# Altium PCB F_ROM.PcbDoc (part 1 of 3)
Units mil, origin at the board's own origin, x right, y up, seen from the top; angles counter-clockwise.
Board outline 10300 x 6600 mil, 2 copper layers (Top Layer, Bottom Layer); 788 components, 376 nets, 1392 pads, 0 vias.
Unrouted connection lines stored in the file: 465.
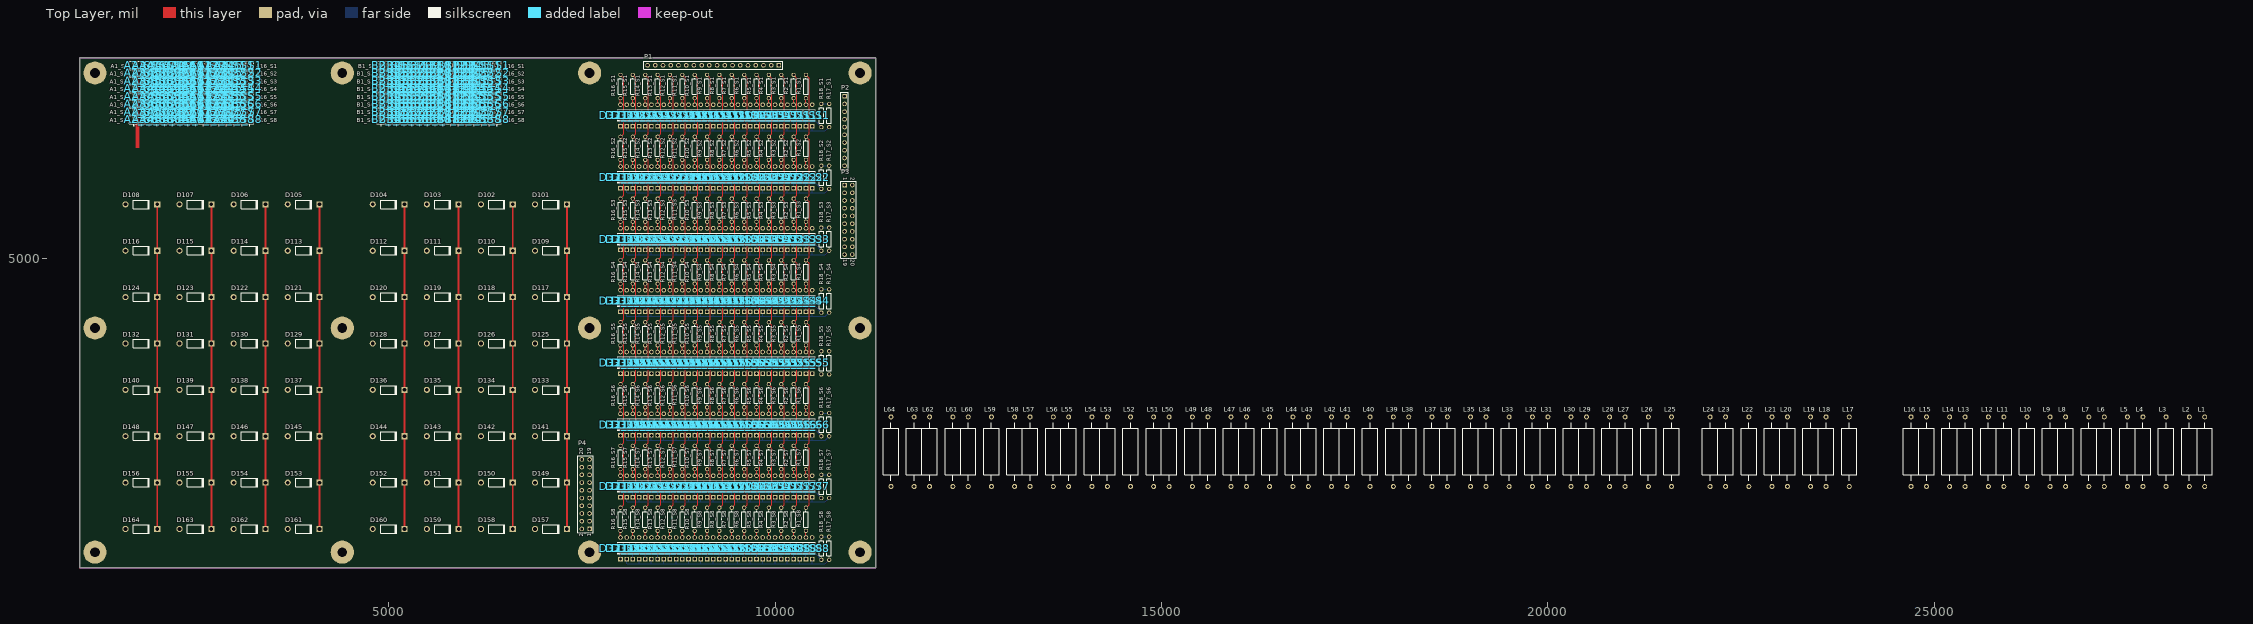
[diagram p0: Top Layer view]
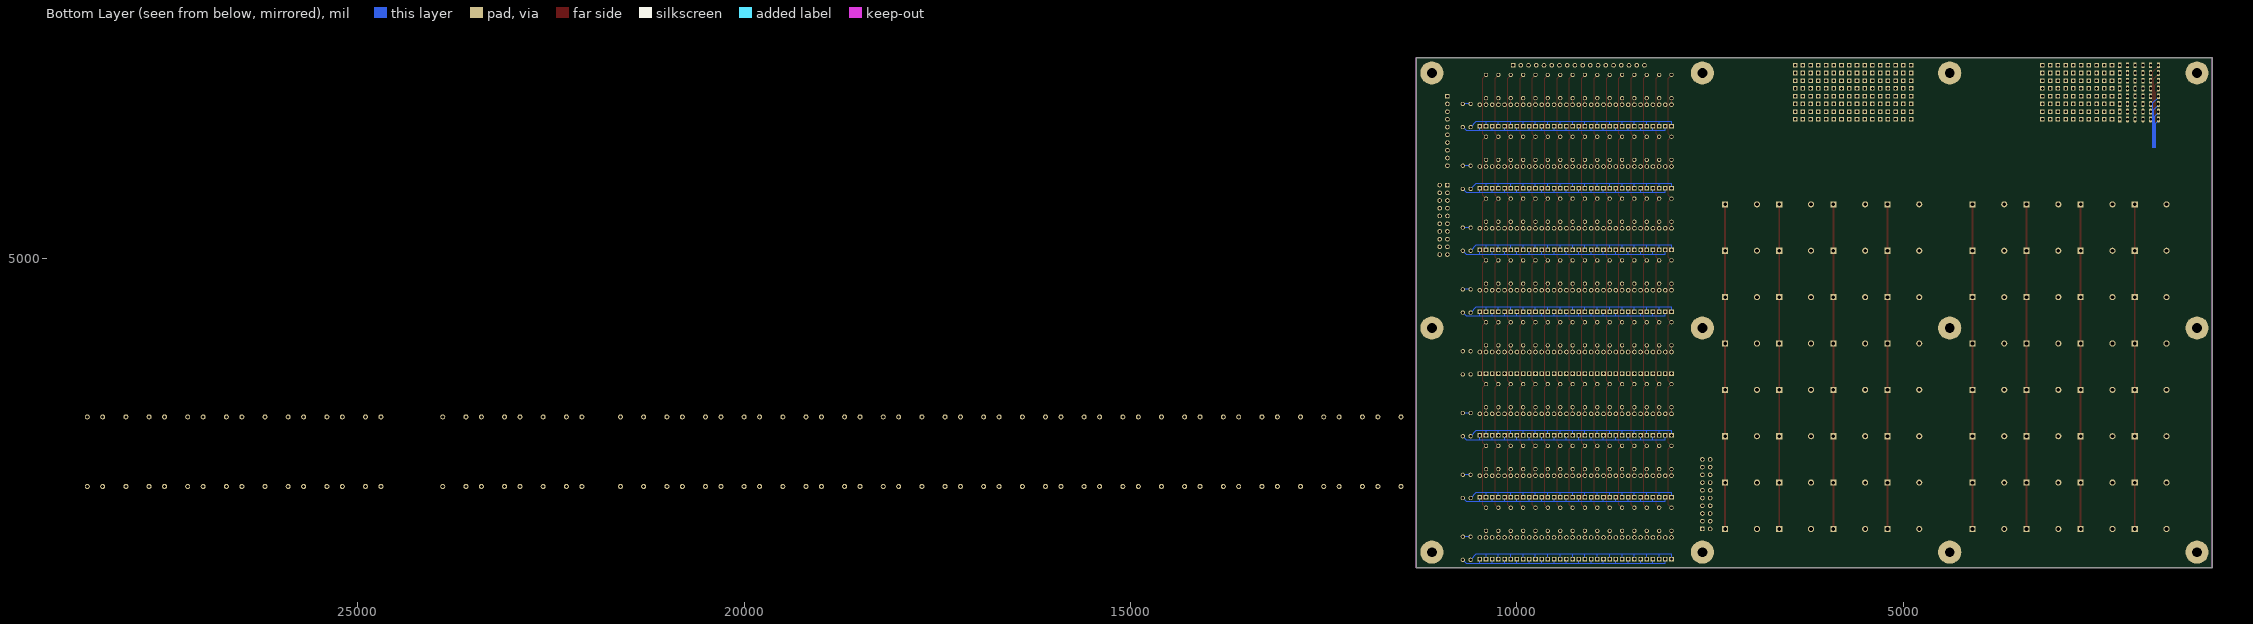
[diagram p1: Bottom Layer view, seen from below]

## Layer stack, top to bottom
Top Solder: solder mask 0.4, Solder Resist, Dk 3.5
Top Layer: signal copper 1.4
Dielectric 1: dielectric 12.6, FR-4, Dk 4.8
Bottom Layer: signal copper 1.4
Bottom Solder: solder mask 0.4, Solder Resist, Dk 3.5

## Board outline
1000,1000 1000,7600 11300,7600 11300,1000

## Design rules (kind name [scope] priority, off if disabled: settings)
Clearance [All] p1: gap=7 ignorepadtopadclearanceinfootprint=FALSE
PolygonConnect [All] p1: connectstyle=Relief reliefconductorwidth=10 reliefentries=4 polygonreliefangle="90 Angle" airgapwidth=10
RoomDefinition S1 [InComponentClass('S1')] p1: confinementstyle=ConfineIn formatcopy=TRUE lockcomponents=FALSE outline 7800,7450 7800,6650 10800,6650 10800,7450
RoomDefinition S7 [InComponentClass('S7')] p2: confinementstyle=ConfineIn formatcopy=TRUE lockcomponents=FALSE outline 7800,2650 7800,1850 10800,1850 10800,2650
RoomDefinition S2 [InComponentClass('S2')] p3: confinementstyle=ConfineIn formatcopy=TRUE lockcomponents=FALSE outline 7800,6650 7800,5850 10800,5850 10800,6650
RoomDefinition S3 [InComponentClass('S3')] p4: confinementstyle=ConfineIn formatcopy=TRUE lockcomponents=FALSE outline 7800,5850 7800,5050 10800,5050 10800,5850
RoomDefinition S4 [InComponentClass('S4')] p5: confinementstyle=ConfineIn formatcopy=TRUE lockcomponents=FALSE outline 7800,5050 7800,4250 10800,4250 10800,5050
RoomDefinition S5 [InComponentClass('S5')] p6: confinementstyle=ConfineIn formatcopy=TRUE lockcomponents=FALSE outline 7800,4250 7800,3450 10800,3450 10800,4250
RoomDefinition S6 [InComponentClass('S6')] p7: confinementstyle=ConfineIn formatcopy=TRUE lockcomponents=FALSE outline 7800,3450 7800,2650 10800,2650 10800,3450
RoomDefinition S8 [InComponentClass('S8')] p8: confinementstyle=ConfineIn formatcopy=TRUE lockcomponents=FALSE outline 7800,1850 7800,1050 10800,1050 10800,1850
RoutingVias [All] p1: holewidth=28 width=50 viastyle="Through Hole" minholewidth=28 minwidth=50 maxholewidth=28 maxwidth=50
SolderMaskExpansion [All] p1: expansion=4 istentingtop=FALSE
Width [All] p1: maxlimit=100 minlimit=6 preferedwidth=8
30 further rules are at their usual default settings.

## Classes and differential pairs
net class P[1..8]: P1 P2 P3 P4 P5 P6 P7 P8
net class N[1..8]: N1 N2 N3 N4 N5 N6 N7 N8
net class L[1..8]: L1 L2 L3 L4 L5 L6 L7 L8
net class H[1..8]: H1 H2 H3 H4 H5 H6 H7 H8
component class Array: D101 D102 D103 D104 D105 D106 D107 D108 D109 D110 D111 D112 D113 D114 D115 D116 D117 D118 D119 D120 D121 D122 D123 D124 D125 D126 D127 D128 D129 D130 D131 D132 D133 D134 D135 D136 D137 D138 D139 D140 D141 D142 D143 D144 D145 D146 D147 D148 D149 D150 D151 D152 D153 D154 D155 D156 D157 D158 D159 D160 D161 D162 D163 D164 L1 L2 L3 L4 L5 L6 L7 L8 L9 L10 L11 L12 L13 L14 L15 L16 L17 L18 L19 L20 L21 L22 L23 L24 L25 L26 L27 L28 L29 L30 L31 L32 L33 L34 L35 L36 L37 L38 L39 L40 L41 L42 L43 L44 L45 L46 L47 L48 L49 L50 L51 L52 L53 L54 L55 L56 L57 L58 L59 L60 L61 L62 L63 L64 P1 P2 P4
net class Y[1..8]: Y1 Y2 Y3 Y4 Y5 Y6 Y7 Y8
net class X[1..16]: X1 X2 X3 X4 X5 X6 X7 X8 X9 X10 X11 X12 X13 X14 X15 X16
channel class SenseEnable: S0_9 S0_10 S0_11 S0_12 S0_13 S0_14 S0_15 S0_16 S1 S1_1 S1_2 S1_3 S1_4 S1_5 S1_6 S1_7 S1_8 S1_9 S1_10 S1_11 S1_12 S1_13 S1_14 S1_15 S1_16 S2 S2_1 S2_2 S2_3 S2_4 S2_5 S2_6 S2_7 S2_8 S2_9 S2_10 S2_11 S2_12 S2_13 S2_14 S2_15 S2_16 S3 S3_1 S3_2 S3_3 S3_4 S3_5 S3_6 S3_7 S3_8 S3_9 S3_10 S3_11 S3_12 S3_13 S3_14 S3_15 S3_16 S4 S4_1 S4_2 S4_3 S4_4 S4_5 S4_6 S4_7 S4_8 S4_9 S4_10 S4_11 S4_12 S4_13 S4_14 S4_15 S4_16 S5 S5_1 S5_2 S5_3 S5_4 S5_5 S5_6 S5_7 S5_8 S5_9 S5_10 S5_11 S5_12 S5_13 S5_14 S5_15 S5_16 S6 S6_1 S6_2 S6_3 S6_4 S6_5 S6_6 S6_7 S6_8 S6_9 S6_10 S6_11 S6_12 S6_13 S6_14 S6_15 S6_16 S7 S7_1 S7_2 S7_3 S7_4 S7_5 S7_6 S7_7 S7_8 S7_9 S7_10 S7_11 S7_12 S7_13 S7_14 S7_15 S7_16 S8
component class S8: A1_S8 A2_S8 A3_S8 A4_S8 A5_S8 A6_S8 A7_S8 A8_S8 A9_S8 A10_S8 A11_S8 A12_S8 A13_S8 A14_S8 A15_S8 A16_S8 B1_S8 B2_S8 B3_S8 B4_S8 B5_S8 B6_S8 B7_S8 B8_S8 B9_S8 B10_S8 B11_S8 B12_S8 B13_S8 B14_S8 B15_S8 B16_S8 D1_S8 D2_S8 D3_S8 D4_S8 D5_S8 D6_S8 D7_S8 D8_S8 D9_S8 D10_S8 D11_S8 D12_S8 D13_S8 D14_S8 D15_S8 D16_S8 D17_S8 D18_S8 D19_S8 D20_S8 D21_S8 D22_S8 D23_S8 D24_S8 D25_S8 D26_S8 D27_S8 D28_S8 D29_S8 D30_S8 D31_S8 D32_S8 R1_S8 R2_S8 R3_S8 R4_S8 R5_S8 R6_S8 R7_S8 R8_S8 R9_S8 R10_S8 R11_S8 R12_S8 R13_S8 R14_S8 R15_S8 R16_S8 R17_S8 R18_S8
component class S7: A1_S7 A2_S7 A3_S7 A4_S7 A5_S7 A6_S7 A7_S7 A8_S7 A9_S7 A10_S7 A11_S7 A12_S7 A13_S7 A14_S7 A15_S7 A16_S7 B1_S7 B2_S7 B3_S7 B4_S7 B5_S7 B6_S7 B7_S7 B8_S7 B9_S7 B10_S7 B11_S7 B12_S7 B13_S7 B14_S7 B15_S7 B16_S7 D1_S7 D2_S7 D3_S7 D4_S7 D5_S7 D6_S7 D7_S7 D8_S7 D9_S7 D10_S7 D11_S7 D12_S7 D13_S7 D14_S7 D15_S7 D16_S7 D17_S7 D18_S7 D19_S7 D20_S7 D21_S7 D22_S7 D23_S7 D24_S7 D25_S7 D26_S7 D27_S7 D28_S7 D29_S7 D30_S7 D31_S7 D32_S7 R1_S7 R2_S7 R3_S7 R4_S7 R5_S7 R6_S7 R7_S7 R8_S7 R9_S7 R10_S7 R11_S7 R12_S7 R13_S7 R14_S7 R15_S7 R16_S7 R17_S7 R18_S7
component class S6: A1_S6 A2_S6 A3_S6 A4_S6 A5_S6 A6_S6 A7_S6 A8_S6 A9_S6 A10_S6 A11_S6 A12_S6 A13_S6 A14_S6 A15_S6 A16_S6 B1_S6 B2_S6 B3_S6 B4_S6 B5_S6 B6_S6 B7_S6 B8_S6 B9_S6 B10_S6 B11_S6 B12_S6 B13_S6 B14_S6 B15_S6 B16_S6 D1_S6 D2_S6 D3_S6 D4_S6 D5_S6 D6_S6 D7_S6 D8_S6 D9_S6 D10_S6 D11_S6 D12_S6 D13_S6 D14_S6 D15_S6 D16_S6 D17_S6 D18_S6 D19_S6 D20_S6 D21_S6 D22_S6 D23_S6 D24_S6 D25_S6 D26_S6 D27_S6 D28_S6 D29_S6 D30_S6 D31_S6 D32_S6 R1_S6 R2_S6 R3_S6 R4_S6 R5_S6 R6_S6 R7_S6 R8_S6 R9_S6 R10_S6 R11_S6 R12_S6 R13_S6 R14_S6 R15_S6 R16_S6 R17_S6 R18_S6
component class S5: A1_S5 A2_S5 A3_S5 A4_S5 A5_S5 A6_S5 A7_S5 A8_S5 A9_S5 A10_S5 A11_S5 A12_S5 A13_S5 A14_S5 A15_S5 A16_S5 B1_S5 B2_S5 B3_S5 B4_S5 B5_S5 B6_S5 B7_S5 B8_S5 B9_S5 B10_S5 B11_S5 B12_S5 B13_S5 B14_S5 B15_S5 B16_S5 D1_S5 D2_S5 D3_S5 D4_S5 D5_S5 D6_S5 D7_S5 D8_S5 D9_S5 D10_S5 D11_S5 D12_S5 D13_S5 D14_S5 D15_S5 D16_S5 D17_S5 D18_S5 D19_S5 D20_S5 D21_S5 D22_S5 D23_S5 D24_S5 D25_S5 D26_S5 D27_S5 D28_S5 D29_S5 D30_S5 D31_S5 D32_S5 R1_S5 R2_S5 R3_S5 R4_S5 R5_S5 R6_S5 R7_S5 R8_S5 R9_S5 R10_S5 R11_S5 R12_S5 R13_S5 R14_S5 R15_S5 R16_S5 R17_S5 R18_S5
component class S4: A1_S4 A2_S4 A3_S4 A4_S4 A5_S4 A6_S4 A7_S4 A8_S4 A9_S4 A10_S4 A11_S4 A12_S4 A13_S4 A14_S4 A15_S4 A16_S4 B1_S4 B2_S4 B3_S4 B4_S4 B5_S4 B6_S4 B7_S4 B8_S4 B9_S4 B10_S4 B11_S4 B12_S4 B13_S4 B14_S4 B15_S4 B16_S4 D1_S4 D2_S4 D3_S4 D4_S4 D5_S4 D6_S4 D7_S4 D8_S4 D9_S4 D10_S4 D11_S4 D12_S4 D13_S4 D14_S4 D15_S4 D16_S4 D17_S4 D18_S4 D19_S4 D20_S4 D21_S4 D22_S4 D23_S4 D24_S4 D25_S4 D26_S4 D27_S4 D28_S4 D29_S4 D30_S4 D31_S4 D32_S4 R1_S4 R2_S4 R3_S4 R4_S4 R5_S4 R6_S4 R7_S4 R8_S4 R9_S4 R10_S4 R11_S4 R12_S4 R13_S4 R14_S4 R15_S4 R16_S4 R17_S4 R18_S4
component class S3: A1_S3 A2_S3 A3_S3 A4_S3 A5_S3 A6_S3 A7_S3 A8_S3 A9_S3 A10_S3 A11_S3 A12_S3 A13_S3 A14_S3 A15_S3 A16_S3 B1_S3 B2_S3 B3_S3 B4_S3 B5_S3 B6_S3 B7_S3 B8_S3 B9_S3 B10_S3 B11_S3 B12_S3 B13_S3 B14_S3 B15_S3 B16_S3 D1_S3 D2_S3 D3_S3 D4_S3 D5_S3 D6_S3 D7_S3 D8_S3 D9_S3 D10_S3 D11_S3 D12_S3 D13_S3 D14_S3 D15_S3 D16_S3 D17_S3 D18_S3 D19_S3 D20_S3 D21_S3 D22_S3 D23_S3 D24_S3 D25_S3 D26_S3 D27_S3 D28_S3 D29_S3 D30_S3 D31_S3 D32_S3 R1_S3 R2_S3 R3_S3 R4_S3 R5_S3 R6_S3 R7_S3 R8_S3 R9_S3 R10_S3 R11_S3 R12_S3 R13_S3 R14_S3 R15_S3 R16_S3 R17_S3 R18_S3
component class S2: A1_S2 A2_S2 A3_S2 A4_S2 A5_S2 A6_S2 A7_S2 A8_S2 A9_S2 A10_S2 A11_S2 A12_S2 A13_S2 A14_S2 A15_S2 A16_S2 B1_S2 B2_S2 B3_S2 B4_S2 B5_S2 B6_S2 B7_S2 B8_S2 B9_S2 B10_S2 B11_S2 B12_S2 B13_S2 B14_S2 B15_S2 B16_S2 D1_S2 D2_S2 D3_S2 D4_S2 D5_S2 D6_S2 D7_S2 D8_S2 D9_S2 D10_S2 D11_S2 D12_S2 D13_S2 D14_S2 D15_S2 D16_S2 D17_S2 D18_S2 D19_S2 D20_S2 D21_S2 D22_S2 D23_S2 D24_S2 D25_S2 D26_S2 D27_S2 D28_S2 D29_S2 D30_S2 D31_S2 D32_S2 R1_S2 R2_S2 R3_S2 R4_S2 R5_S2 R6_S2 R7_S2 R8_S2 R9_S2 R10_S2 R11_S2 R12_S2 R13_S2 R14_S2 R15_S2 R16_S2 R17_S2 R18_S2
component class S1: A1_S1 A2_S1 A3_S1 A4_S1 A5_S1 A6_S1 A7_S1 A8_S1 A9_S1 A10_S1 A11_S1 A12_S1 A13_S1 A14_S1 A15_S1 A16_S1 B1_S1 B2_S1 B3_S1 B4_S1 B5_S1 B6_S1 B7_S1 B8_S1 B9_S1 B10_S1 B11_S1 B12_S1 B13_S1 B14_S1 B15_S1 B16_S1 D1_S1 D2_S1 D3_S1 D4_S1 D5_S1 D6_S1 D7_S1 D8_S1 D9_S1 D10_S1 D11_S1 D12_S1 D13_S1 D14_S1 D15_S1 D16_S1 D17_S1 D18_S1 D19_S1 D20_S1 D21_S1 D22_S1 D23_S1 D24_S1 D25_S1 D26_S1 D27_S1 D28_S1 D29_S1 D30_S1 D31_S1 D32_S1 R1_S1 R2_S1 R3_S1 R4_S1 R5_S1 R6_S1 R7_S1 R8_S1 R9_S1 R10_S1 R11_S1 R12_S1 R13_S1 R14_S1 R15_S1 R16_S1 R17_S1 R18_S1

## Components (designator, comment, footprint, x,y, rotation, side; value= is the part's Value field where it differs from the comment)
A1_S1 "Plug" PIN1#1 1700,7500 r180 top (schematic designator A1)
A1_S2 "Plug" PIN1#1 1700,7400 r180 top (schematic designator A1)
A1_S3 "Plug" PIN1#1 1700,7300 r180 top (schematic designator A1)
A1_S4 "Plug" PIN1#1 1700,7200 r180 top (schematic designator A1)
A1_S5 "Plug" PIN1#1 1700,7100 r180 top (schematic designator A1)
A1_S6 "Plug" PIN1#1 1700,7000 r180 top (schematic designator A1)
A1_S7 "Plug" PIN1#1 1700,6900 r180 top (schematic designator A1)
A1_S8 "Plug" PIN1#1 1700,6800 r180 top (schematic designator A1)
A2_S1 "Plug" PIN1#1 1800,7500 r180 top (schematic designator A2)
A2_S2 "Plug" PIN1#1 1800,7400 r180 top (schematic designator A2)
A2_S3 "Plug" PIN1#1 1800,7300 r180 top (schematic designator A2)
A2_S4 "Plug" PIN1#1 1800,7200 r180 top (schematic designator A2)
A2_S5 "Plug" PIN1#1 1800,7100 r180 top (schematic designator A2)
A2_S6 "Plug" PIN1#1 1800,7000 r180 top (schematic designator A2)
A2_S7 "Plug" PIN1#1 1800,6900 r180 top (schematic designator A2)
A2_S8 "Plug" PIN1#1 1800,6800 r180 top (schematic designator A2)
A3_S1 "Plug" PIN1#1 1900,7500 r180 top (schematic designator A3)
A3_S2 "Plug" PIN1#1 1900,7400 r180 top (schematic designator A3)
A3_S3 "Plug" PIN1#1 1900,7300 r180 top (schematic designator A3)
A3_S4 "Plug" PIN1#1 1900,7200 r180 top (schematic designator A3)
A3_S5 "Plug" PIN1#1 1900,7100 r180 top (schematic designator A3)
A3_S6 "Plug" PIN1#1 1900,7000 r180 top (schematic designator A3)
A3_S7 "Plug" PIN1#1 1900,6900 r180 top (schematic designator A3)
A3_S8 "Plug" PIN1#1 1900,6800 r180 top (schematic designator A3)
A4_S1 "Plug" PIN1#1 2000,7500 r180 top (schematic designator A4)
A4_S2 "Plug" PIN1#1 2000,7400 r180 top (schematic designator A4)
A4_S3 "Plug" PIN1#1 2000,7300 r180 top (schematic designator A4)
A4_S4 "Plug" PIN1#1 2000,7200 r180 top (schematic designator A4)
A4_S5 "Plug" PIN1#1 2000,7100 r180 top (schematic designator A4)
A4_S6 "Plug" PIN1#1 2000,7000 r180 top (schematic designator A4)
A4_S7 "Plug" PIN1#1 2000,6900 r180 top (schematic designator A4)
A4_S8 "Plug" PIN1#1 2000,6800 r180 top (schematic designator A4)
A5_S1 "Plug" PIN1#1 2100,7500 r180 top (schematic designator A5)
A5_S2 "Plug" PIN1#1 2100,7400 r180 top (schematic designator A5)
A5_S3 "Plug" PIN1#1 2100,7300 r180 top (schematic designator A5)
A5_S4 "Plug" PIN1#1 2100,7200 r180 top (schematic designator A5)
A5_S5 "Plug" PIN1#1 2100,7100 r180 top (schematic designator A5)
A5_S6 "Plug" PIN1#1 2100,7000 r180 top (schematic designator A5)
A5_S7 "Plug" PIN1#1 2100,6900 r180 top (schematic designator A5)
A5_S8 "Plug" PIN1#1 2100,6800 r180 top (schematic designator A5)
A6_S1 "Plug" PIN1#2 2200,7500 r180 top (schematic designator A6)
A6_S2 "Plug" PIN1#2 2200,7400 r180 top (schematic designator A6)
A6_S3 "Plug" PIN1#2 2200,7300 r180 top (schematic designator A6)
A6_S4 "Plug" PIN1#2 2200,7200 r180 top (schematic designator A6)
A6_S5 "Plug" PIN1#2 2200,7100 r180 top (schematic designator A6)
A6_S6 "Plug" PIN1#2 2200,7000 r180 top (schematic designator A6)
A6_S7 "Plug" PIN1#2 2200,6900 r180 top (schematic designator A6)
A6_S8 "Plug" PIN1#2 2200,6800 r180 top (schematic designator A6)
A7_S1 "Plug" PIN1#3 2300,7500 r180 top (schematic designator A7)
A7_S2 "Plug" PIN1#3 2300,7400 r180 top (schematic designator A7)
A7_S3 "Plug" PIN1#3 2300,7300 r180 top (schematic designator A7)
A7_S4 "Plug" PIN1#3 2300,7200 r180 top (schematic designator A7)
A7_S5 "Plug" PIN1#3 2300,7100 r180 top (schematic designator A7)
A7_S6 "Plug" PIN1#3 2300,7000 r180 top (schematic designator A7)
A7_S7 "Plug" PIN1#3 2300,6900 r180 top (schematic designator A7)
A7_S8 "Plug" PIN1#3 2300,6800 r180 top (schematic designator A7)
A8_S1 "Plug" PIN1#3 2400,7500 r180 top (schematic designator A8)
A8_S2 "Plug" PIN1#3 2400,7400 r180 top (schematic designator A8)
A8_S3 "Plug" PIN1#3 2400,7300 r180 top (schematic designator A8)
A8_S4 "Plug" PIN1#3 2400,7200 r180 top (schematic designator A8)
A8_S5 "Plug" PIN1#3 2400,7100 r180 top (schematic designator A8)
A8_S6 "Plug" PIN1#3 2400,7000 r180 top (schematic designator A8)
A8_S7 "Plug" PIN1#3 2400,6900 r180 top (schematic designator A8)
A8_S8 "Plug" PIN1#3 2400,6800 r180 top (schematic designator A8)
A9_S1 "Plug" PIN1#3 2500,7500 r180 top (schematic designator A9)
A9_S2 "Plug" PIN1#3 2500,7400 r180 top (schematic designator A9)
A9_S3 "Plug" PIN1#3 2500,7300 r180 top (schematic designator A9)
A9_S4 "Plug" PIN1#3 2500,7200 r180 top (schematic designator A9)
A9_S5 "Plug" PIN1#3 2500,7100 r180 top (schematic designator A9)
A9_S6 "Plug" PIN1#3 2500,7000 r180 top (schematic designator A9)
A9_S7 "Plug" PIN1#3 2500,6900 r180 top (schematic designator A9)
A9_S8 "Plug" PIN1#3 2500,6800 r180 top (schematic designator A9)
A10_S1 "Plug" PIN1#3 2600,7500 r180 top (schematic designator A10)
A10_S2 "Plug" PIN1#3 2600,7400 r180 top (schematic designator A10)
A10_S3 "Plug" PIN1#3 2600,7300 r180 top (schematic designator A10)
A10_S4 "Plug" PIN1#3 2600,7200 r180 top (schematic designator A10)
A10_S5 "Plug" PIN1#3 2600,7100 r180 top (schematic designator A10)
A10_S6 "Plug" PIN1#3 2600,7000 r180 top (schematic designator A10)
A10_S7 "Plug" PIN1#3 2600,6900 r180 top (schematic designator A10)
A10_S8 "Plug" PIN1#3 2600,6800 r180 top (schematic designator A10)
A11_S1 "Plug" PIN1#3 2700,7500 r180 top (schematic designator A11)
A11_S2 "Plug" PIN1#3 2700,7400 r180 top (schematic designator A11)
A11_S3 "Plug" PIN1#3 2700,7300 r180 top (schematic designator A11)
A11_S4 "Plug" PIN1#3 2700,7200 r180 top (schematic designator A11)
A11_S5 "Plug" PIN1#3 2700,7100 r180 top (schematic designator A11)
A11_S6 "Plug" PIN1#3 2700,7000 r180 top (schematic designator A11)
A11_S7 "Plug" PIN1#3 2700,6900 r180 top (schematic designator A11)
A11_S8 "Plug" PIN1#3 2700,6800 r180 top (schematic designator A11)
A12_S1 "Plug" PIN1#3 2800,7500 r180 top (schematic designator A12)
A12_S2 "Plug" PIN1#3 2800,7400 r180 top (schematic designator A12)
A12_S3 "Plug" PIN1#3 2800,7300 r180 top (schematic designator A12)
A12_S4 "Plug" PIN1#3 2800,7200 r180 top (schematic designator A12)
A12_S5 "Plug" PIN1#3 2800,7100 r180 top (schematic designator A12)
A12_S6 "Plug" PIN1#3 2800,7000 r180 top (schematic designator A12)
A12_S7 "Plug" PIN1#3 2800,6900 r180 top (schematic designator A12)
A12_S8 "Plug" PIN1#3 2800,6800 r180 top (schematic designator A12)
A13_S1 "Plug" PIN1#3 2900,7500 r180 top (schematic designator A13)
A13_S2 "Plug" PIN1#3 2900,7400 r180 top (schematic designator A13)
A13_S3 "Plug" PIN1#3 2900,7300 r180 top (schematic designator A13)
A13_S4 "Plug" PIN1#3 2900,7200 r180 top (schematic designator A13)
A13_S5 "Plug" PIN1#3 2900,7100 r180 top (schematic designator A13)
A13_S6 "Plug" PIN1#3 2900,7000 r180 top (schematic designator A13)
A13_S7 "Plug" PIN1#3 2900,6900 r180 top (schematic designator A13)
A13_S8 "Plug" PIN1#3 2900,6800 r180 top (schematic designator A13)
A14_S1 "Plug" PIN1#3 3000,7500 r180 top (schematic designator A14)
A14_S2 "Plug" PIN1#3 3000,7400 r180 top (schematic designator A14)
A14_S3 "Plug" PIN1#3 3000,7300 r180 top (schematic designator A14)
A14_S4 "Plug" PIN1#3 3000,7200 r180 top (schematic designator A14)
A14_S5 "Plug" PIN1#3 3000,7100 r180 top (schematic designator A14)
A14_S6 "Plug" PIN1#3 3000,7000 r180 top (schematic designator A14)
A14_S7 "Plug" PIN1#3 3000,6900 r180 top (schematic designator A14)
A14_S8 "Plug" PIN1#3 3000,6800 r180 top (schematic designator A14)
A15_S1 "Plug" PIN1#3 3100,7500 r180 top (schematic designator A15)
A15_S2 "Plug" PIN1#3 3100,7400 r180 top (schematic designator A15)
A15_S3 "Plug" PIN1#3 3100,7300 r180 top (schematic designator A15)
A15_S4 "Plug" PIN1#3 3100,7200 r180 top (schematic designator A15)
A15_S5 "Plug" PIN1#3 3100,7100 r180 top (schematic designator A15)
A15_S6 "Plug" PIN1#3 3100,7000 r180 top (schematic designator A15)
A15_S7 "Plug" PIN1#3 3100,6900 r180 top (schematic designator A15)
A15_S8 "Plug" PIN1#3 3100,6800 r180 top (schematic designator A15)
A16_S1 "Plug" PIN1#3 3200,7500 r180 top (schematic designator A16)
A16_S2 "Plug" PIN1#3 3200,7400 r180 top (schematic designator A16)
A16_S3 "Plug" PIN1#3 3200,7300 r180 top (schematic designator A16)
A16_S4 "Plug" PIN1#3 3200,7200 r180 top (schematic designator A16)
A16_S5 "Plug" PIN1#3 3200,7100 r180 top (schematic designator A16)
A16_S6 "Plug" PIN1#3 3200,7000 r180 top (schematic designator A16)
A16_S7 "Plug" PIN1#3 3200,6900 r180 top (schematic designator A16)
A16_S8 "Plug" PIN1#3 3200,6800 r180 top (schematic designator A16)
B1_S1 "Plug" PIN1#3 4900,7500 r180 top (schematic designator B1)
B1_S2 "Plug" PIN1#3 4900,7400 r180 top (schematic designator B1)
B1_S3 "Plug" PIN1#3 4900,7300 r180 top (schematic designator B1)
B1_S4 "Plug" PIN1#3 4900,7200 r180 top (schematic designator B1)
B1_S5 "Plug" PIN1#3 4900,7100 r180 top (schematic designator B1)
B1_S6 "Plug" PIN1#3 4900,7000 r180 top (schematic designator B1)
B1_S7 "Plug" PIN1#3 4900,6900 r180 top (schematic designator B1)
B1_S8 "Plug" PIN1#3 4900,6800 r180 top (schematic designator B1)
B2_S1 "Plug" PIN1#3 5000,7500 r180 top (schematic designator B2)
B2_S2 "Plug" PIN1#3 5000,7400 r180 top (schematic designator B2)
B2_S3 "Plug" PIN1#3 5000,7300 r180 top (schematic designator B2)
B2_S4 "Plug" PIN1#3 5000,7200 r180 top (schematic designator B2)
B2_S5 "Plug" PIN1#3 5000,7100 r180 top (schematic designator B2)
B2_S6 "Plug" PIN1#3 5000,7000 r180 top (schematic designator B2)
B2_S7 "Plug" PIN1#3 5000,6900 r180 top (schematic designator B2)
B2_S8 "Plug" PIN1#3 5000,6800 r180 top (schematic designator B2)
B3_S1 "Plug" PIN1#3 5100,7500 r180 top (schematic designator B3)
B3_S2 "Plug" PIN1#3 5100,7400 r180 top (schematic designator B3)
B3_S3 "Plug" PIN1#3 5100,7300 r180 top (schematic designator B3)
B3_S4 "Plug" PIN1#3 5100,7200 r180 top (schematic designator B3)
B3_S5 "Plug" PIN1#3 5100,7100 r180 top (schematic designator B3)
B3_S6 "Plug" PIN1#3 5100,7000 r180 top (schematic designator B3)
B3_S7 "Plug" PIN1#3 5100,6900 r180 top (schematic designator B3)
B3_S8 "Plug" PIN1#3 5100,6800 r180 top (schematic designator B3)
B4_S1 "Plug" PIN1#3 5200,7500 r180 top (schematic designator B4)
B4_S2 "Plug" PIN1#3 5200,7400 r180 top (schematic designator B4)
B4_S3 "Plug" PIN1#3 5200,7300 r180 top (schematic designator B4)
B4_S4 "Plug" PIN1#3 5200,7200 r180 top (schematic designator B4)
B4_S5 "Plug" PIN1#3 5200,7100 r180 top (schematic designator B4)
B4_S6 "Plug" PIN1#3 5200,7000 r180 top (schematic designator B4)
B4_S7 "Plug" PIN1#3 5200,6900 r180 top (schematic designator B4)
B4_S8 "Plug" PIN1#3 5200,6800 r180 top (schematic designator B4)
B5_S1 "Plug" PIN1#3 5300,7500 r180 top (schematic designator B5)
B5_S2 "Plug" PIN1#3 5300,7400 r180 top (schematic designator B5)
B5_S3 "Plug" PIN1#3 5300,7300 r180 top (schematic designator B5)
B5_S4 "Plug" PIN1#3 5300,7200 r180 top (schematic designator B5)
B5_S5 "Plug" PIN1#3 5300,7100 r180 top (schematic designator B5)
B5_S6 "Plug" PIN1#3 5300,7000 r180 top (schematic designator B5)
B5_S7 "Plug" PIN1#3 5300,6900 r180 top (schematic designator B5)
B5_S8 "Plug" PIN1#3 5300,6800 r180 top (schematic designator B5)
B6_S1 "Plug" PIN1#3 5400,7500 r180 top (schematic designator B6)
B6_S2 "Plug" PIN1#3 5400,7400 r180 top (schematic designator B6)
B6_S3 "Plug" PIN1#3 5400,7300 r180 top (schematic designator B6)
B6_S4 "Plug" PIN1#3 5400,7200 r180 top (schematic designator B6)
B6_S5 "Plug" PIN1#3 5400,7100 r180 top (schematic designator B6)
B6_S6 "Plug" PIN1#3 5400,7000 r180 top (schematic designator B6)
B6_S7 "Plug" PIN1#3 5400,6900 r180 top (schematic designator B6)
B6_S8 "Plug" PIN1#3 5400,6800 r180 top (schematic designator B6)
B7_S1 "Plug" PIN1#3 5500,7500 r180 top (schematic designator B7)
B7_S2 "Plug" PIN1#3 5500,7400 r180 top (schematic designator B7)
B7_S3 "Plug" PIN1#3 5500,7300 r180 top (schematic designator B7)
B7_S4 "Plug" PIN1#3 5500,7200 r180 top (schematic designator B7)
B7_S5 "Plug" PIN1#3 5500,7100 r180 top (schematic designator B7)
B7_S6 "Plug" PIN1#3 5500,7000 r180 top (schematic designator B7)
B7_S7 "Plug" PIN1#3 5500,6900 r180 top (schematic designator B7)
B7_S8 "Plug" PIN1#3 5500,6800 r180 top (schematic designator B7)
B8_S1 "Plug" PIN1#3 5600,7500 r180 top (schematic designator B8)
B8_S2 "Plug" PIN1#3 5600,7400 r180 top (schematic designator B8)
B8_S3 "Plug" PIN1#3 5600,7300 r180 top (schematic designator B8)
B8_S4 "Plug" PIN1#3 5600,7200 r180 top (schematic designator B8)
B8_S5 "Plug" PIN1#3 5600,7100 r180 top (schematic designator B8)
B8_S6 "Plug" PIN1#3 5600,7000 r180 top (schematic designator B8)
B8_S7 "Plug" PIN1#3 5600,6900 r180 top (schematic designator B8)
B8_S8 "Plug" PIN1#3 5600,6800 r180 top (schematic designator B8)
B9_S1 "Plug" PIN1#3 5700,7500 r180 top (schematic designator B9)
B9_S2 "Plug" PIN1#3 5700,7400 r180 top (schematic designator B9)
B9_S3 "Plug" PIN1#3 5700,7300 r180 top (schematic designator B9)
B9_S4 "Plug" PIN1#3 5700,7200 r180 top (schematic designator B9)
B9_S5 "Plug" PIN1#3 5700,7100 r180 top (schematic designator B9)
B9_S6 "Plug" PIN1#3 5700,7000 r180 top (schematic designator B9)
B9_S7 "Plug" PIN1#3 5700,6900 r180 top (schematic designator B9)
B9_S8 "Plug" PIN1#3 5700,6800 r180 top (schematic designator B9)
B10_S1 "Plug" PIN1#3 5800,7500 r180 top (schematic designator B10)
B10_S2 "Plug" PIN1#3 5800,7400 r180 top (schematic designator B10)
B10_S3 "Plug" PIN1#3 5800,7300 r180 top (schematic designator B10)
B10_S4 "Plug" PIN1#3 5800,7200 r180 top (schematic designator B10)
B10_S5 "Plug" PIN1#3 5800,7100 r180 top (schematic designator B10)
B10_S6 "Plug" PIN1#3 5800,7000 r180 top (schematic designator B10)
B10_S7 "Plug" PIN1#3 5800,6900 r180 top (schematic designator B10)
B10_S8 "Plug" PIN1#3 5800,6800 r180 top (schematic designator B10)
B11_S1 "Plug" PIN1#3 5900,7500 r180 top (schematic designator B11)
B11_S2 "Plug" PIN1#3 5900,7400 r180 top (schematic designator B11)
B11_S3 "Plug" PIN1#3 5900,7300 r180 top (schematic designator B11)
B11_S4 "Plug" PIN1#3 5900,7200 r180 top (schematic designator B11)
B11_S5 "Plug" PIN1#3 5900,7100 r180 top (schematic designator B11)
B11_S6 "Plug" PIN1#3 5900,7000 r180 top (schematic designator B11)
B11_S7 "Plug" PIN1#3 5900,6900 r180 top (schematic designator B11)
B11_S8 "Plug" PIN1#3 5900,6800 r180 top (schematic designator B11)
B12_S1 "Plug" PIN1#3 6000,7500 r180 top (schematic designator B12)
B12_S2 "Plug" PIN1#3 6000,7400 r180 top (schematic designator B12)
B12_S3 "Plug" PIN1#3 6000,7300 r180 top (schematic designator B12)
B12_S4 "Plug" PIN1#3 6000,7200 r180 top (schematic designator B12)
B12_S5 "Plug" PIN1#3 6000,7100 r180 top (schematic designator B12)
B12_S6 "Plug" PIN1#3 6000,7000 r180 top (schematic designator B12)
B12_S7 "Plug" PIN1#3 6000,6900 r180 top (schematic designator B12)
B12_S8 "Plug" PIN1#3 6000,6800 r180 top (schematic designator B12)
B13_S1 "Plug" PIN1#3 6100,7500 r180 top (schematic designator B13)
B13_S2 "Plug" PIN1#3 6100,7400 r180 top (schematic designator B13)
B13_S3 "Plug" PIN1#3 6100,7300 r180 top (schematic designator B13)
B13_S4 "Plug" PIN1#3 6100,7200 r180 top (schematic designator B13)
B13_S5 "Plug" PIN1#3 6100,7100 r180 top (schematic designator B13)
B13_S6 "Plug" PIN1#3 6100,7000 r180 top (schematic designator B13)
B13_S7 "Plug" PIN1#3 6100,6900 r180 top (schematic designator B13)
B13_S8 "Plug" PIN1#3 6100,6800 r180 top (schematic designator B13)
B14_S1 "Plug" PIN1#3 6200,7500 r180 top (schematic designator B14)
B14_S2 "Plug" PIN1#3 6200,7400 r180 top (schematic designator B14)
B14_S3 "Plug" PIN1#3 6200,7300 r180 top (schematic designator B14)
B14_S4 "Plug" PIN1#3 6200,7200 r180 top (schematic designator B14)
B14_S5 "Plug" PIN1#3 6200,7100 r180 top (schematic designator B14)
B14_S6 "Plug" PIN1#3 6200,7000 r180 top (schematic designator B14)
B14_S7 "Plug" PIN1#3 6200,6900 r180 top (schematic designator B14)
B14_S8 "Plug" PIN1#3 6200,6800 r180 top (schematic designator B14)
B15_S1 "Plug" PIN1#3 6300,7500 r180 top (schematic designator B15)
B15_S2 "Plug" PIN1#3 6300,7400 r180 top (schematic designator B15)
B15_S3 "Plug" PIN1#3 6300,7300 r180 top (schematic designator B15)
B15_S4 "Plug" PIN1#3 6300,7200 r180 top (schematic designator B15)
B15_S5 "Plug" PIN1#3 6300,7100 r180 top (schematic designator B15)
B15_S6 "Plug" PIN1#3 6300,7000 r180 top (schematic designator B15)
B15_S7 "Plug" PIN1#3 6300,6900 r180 top (schematic designator B15)
B15_S8 "Plug" PIN1#3 6300,6800 r180 top (schematic designator B15)
B16_S1 "Plug" PIN1#3 6400,7500 r180 top (schematic designator B16)
B16_S2 "Plug" PIN1#3 6400,7400 r180 top (schematic designator B16)
B16_S3 "Plug" PIN1#3 6400,7300 r180 top (schematic designator B16)
B16_S4 "Plug" PIN1#3 6400,7200 r180 top (schematic designator B16)
B16_S5 "Plug" PIN1#3 6400,7100 r180 top (schematic designator B16)
B16_S6 "Plug" PIN1#3 6400,7000 r180 top (schematic designator B16)
B16_S7 "Plug" PIN1#3 6400,6900 r180 top (schematic designator B16)
B16_S8 "Plug" PIN1#3 6400,6800 r180 top (schematic designator B16)
D1_S1 "1N4148" DO-35 10480,6850 r270 top (schematic designator D1)
D1_S2 "1N4148" DO-35 10480,6050 r270 top (schematic designator D1)
D1_S3 "1N4148" DO-35 10480,5250 r270 top (schematic designator D1)
D1_S4 "1N4148" DO-35 10480,4450 r270 top (schematic designator D1)
D1_S5 "1N4148" DO-35 10480,3650 r270 top (schematic designator D1)
D1_S6 "1N4148" DO-35 10480,2850 r270 top (schematic designator D1)
D1_S7 "1N4148" DO-35 10480,2050 r270 top (schematic designator D1)
D1_S8 "1N4148" DO-35 10480,1250 r270 top (schematic designator D1)
D2_S1 "1N4148" DO-35 10400,6850 r270 top (schematic designator D2)
D2_S2 "1N4148" DO-35 10400,6050 r270 top (schematic designator D2)
D2_S3 "1N4148" DO-35 10400,5250 r270 top (schematic designator D2)
D2_S4 "1N4148" DO-35 10400,4450 r270 top (schematic designator D2)
D2_S5 "1N4148" DO-35 10400,3650 r270 top (schematic designator D2)
D2_S6 "1N4148" DO-35 10400,2850 r270 top (schematic designator D2)
D2_S7 "1N4148" DO-35 10400,2050 r270 top (schematic designator D2)
D2_S8 "1N4148" DO-35 10400,1250 r270 top (schematic designator D2)
D3_S1 "1N4148" DO-35 10320,6850 r270 top (schematic designator D3)
D3_S2 "1N4148" DO-35 10320,6050 r270 top (schematic designator D3)
D3_S3 "1N4148" DO-35 10320,5250 r270 top (schematic designator D3)
D3_S4 "1N4148" DO-35 10320,4450 r270 top (schematic designator D3)
D3_S5 "1N4148" DO-35 10320,3650 r270 top (schematic designator D3)
D3_S6 "1N4148" DO-35 10320,2850 r270 top (schematic designator D3)
D3_S7 "1N4148" DO-35 10320,2050 r270 top (schematic designator D3)
D3_S8 "1N4148" DO-35 10320,1250 r270 top (schematic designator D3)
D4_S1 "1N4148" DO-35 10240,6850 r270 top (schematic designator D4)
D4_S2 "1N4148" DO-35 10240,6050 r270 top (schematic designator D4)
D4_S3 "1N4148" DO-35 10240,5250 r270 top (schematic designator D4)
D4_S4 "1N4148" DO-35 10240,4450 r270 top (schematic designator D4)
D4_S5 "1N4148" DO-35 10240,3650 r270 top (schematic designator D4)
D4_S6 "1N4148" DO-35 10240,2850 r270 top (schematic designator D4)
D4_S7 "1N4148" DO-35 10240,2050 r270 top (schematic designator D4)
D4_S8 "1N4148" DO-35 10240,1250 r270 top (schematic designator D4)
D5_S1 "1N4148" DO-35 10160,6850 r270 top (schematic designator D5)
D5_S2 "1N4148" DO-35 10160,6050 r270 top (schematic designator D5)
D5_S3 "1N4148" DO-35 10160,5250 r270 top (schematic designator D5)
D5_S4 "1N4148" DO-35 10160,4450 r270 top (schematic designator D5)
D5_S5 "1N4148" DO-35 10160,3650 r270 top (schematic designator D5)
D5_S6 "1N4148" DO-35 10160,2850 r270 top (schematic designator D5)
D5_S7 "1N4148" DO-35 10160,2050 r270 top (schematic designator D5)
D5_S8 "1N4148" DO-35 10160,1250 r270 top (schematic designator D5)
D6_S1 "1N4148" DO-35 10080,6850 r270 top (schematic designator D6)
D6_S2 "1N4148" DO-35 10080,6050 r270 top (schematic designator D6)
D6_S3 "1N4148" DO-35 10080,5250 r270 top (schematic designator D6)
D6_S4 "1N4148" DO-35 10080,4450 r270 top (schematic designator D6)
D6_S5 "1N4148" DO-35 10080,3650 r270 top (schematic designator D6)
D6_S6 "1N4148" DO-35 10080,2850 r270 top (schematic designator D6)
D6_S7 "1N4148" DO-35 10080,2050 r270 top (schematic designator D6)
D6_S8 "1N4148" DO-35 10080,1250 r270 top (schematic designator D6)
D7_S1 "1N4148" DO-35 10000,6850 r270 top (schematic designator D7)
D7_S2 "1N4148" DO-35 10000,6050 r270 top (schematic designator D7)
D7_S3 "1N4148" DO-35 10000,5250 r270 top (schematic designator D7)
D7_S4 "1N4148" DO-35 10000,4450 r270 top (schematic designator D7)
D7_S5 "1N4148" DO-35 10000,3650 r270 top (schematic designator D7)
D7_S6 "1N4148" DO-35 10000,2850 r270 top (schematic designator D7)
D7_S7 "1N4148" DO-35 10000,2050 r270 top (schematic designator D7)
D7_S8 "1N4148" DO-35 10000,1250 r270 top (schematic designator D7)
D8_S1 "1N4148" DO-35 9920,6850 r270 top (schematic designator D8)
D8_S2 "1N4148" DO-35 9920,6050 r270 top (schematic designator D8)
D8_S3 "1N4148" DO-35 9920,5250 r270 top (schematic designator D8)
D8_S4 "1N4148" DO-35 9920,4450 r270 top (schematic designator D8)
D8_S5 "1N4148" DO-35 9920,3650 r270 top (schematic designator D8)
D8_S6 "1N4148" DO-35 9920,2850 r270 top (schematic designator D8)
D8_S7 "1N4148" DO-35 9920,2050 r270 top (schematic designator D8)
D8_S8 "1N4148" DO-35 9920,1250 r270 top (schematic designator D8)
D9_S1 "1N4148" DO-35 9840,6850 r270 top (schematic designator D9)
D9_S2 "1N4148" DO-35 9840,6050 r270 top (schematic designator D9)
D9_S3 "1N4148" DO-35 9840,5250 r270 top (schematic designator D9)
D9_S4 "1N4148" DO-35 9840,4450 r270 top (schematic designator D9)
D9_S5 "1N4148" DO-35 9840,3650 r270 top (schematic designator D9)
D9_S6 "1N4148" DO-35 9840,2850 r270 top (schematic designator D9)
D9_S7 "1N4148" DO-35 9840,2050 r270 top (schematic designator D9)
D9_S8 "1N4148" DO-35 9840,1250 r270 top (schematic designator D9)
D10_S1 "1N4148" DO-35 9760,6850 r270 top (schematic designator D10)
D10_S2 "1N4148" DO-35 9760,6050 r270 top (schematic designator D10)
D10_S3 "1N4148" DO-35 9760,5250 r270 top (schematic designator D10)
D10_S4 "1N4148" DO-35 9760,4450 r270 top (schematic designator D10)
D10_S5 "1N4148" DO-35 9760,3650 r270 top (schematic designator D10)
D10_S6 "1N4148" DO-35 9760,2850 r270 top (schematic designator D10)
D10_S7 "1N4148" DO-35 9760,2050 r270 top (schematic designator D10)
D10_S8 "1N4148" DO-35 9760,1250 r270 top (schematic designator D10)
D11_S1 "1N4148" DO-35 9680,6850 r270 top (schematic designator D11)
D11_S2 "1N4148" DO-35 9680,6050 r270 top (schematic designator D11)
D11_S3 "1N4148" DO-35 9680,5250 r270 top (schematic designator D11)
D11_S4 "1N4148" DO-35 9680,4450 r270 top (schematic designator D11)
D11_S5 "1N4148" DO-35 9680,3650 r270 top (schematic designator D11)
D11_S6 "1N4148" DO-35 9680,2850 r270 top (schematic designator D11)
D11_S7 "1N4148" DO-35 9680,2050 r270 top (schematic designator D11)
D11_S8 "1N4148" DO-35 9680,1250 r270 top (schematic designator D11)
D12_S1 "1N4148" DO-35 9600,6850 r270 top (schematic designator D12)
D12_S2 "1N4148" DO-35 9600,6050 r270 top (schematic designator D12)
D12_S3 "1N4148" DO-35 9600,5250 r270 top (schematic designator D12)
D12_S4 "1N4148" DO-35 9600,4450 r270 top (schematic designator D12)
D12_S5 "1N4148" DO-35 9600,3650 r270 top (schematic designator D12)
D12_S6 "1N4148" DO-35 9600,2850 r270 top (schematic designator D12)
D12_S7 "1N4148" DO-35 9600,2050 r270 top (schematic designator D12)
D12_S8 "1N4148" DO-35 9600,1250 r270 top (schematic designator D12)
D13_S1 "1N4148" DO-35 9520,6850 r270 top (schematic designator D13)
D13_S2 "1N4148" DO-35 9520,6050 r270 top (schematic designator D13)
D13_S3 "1N4148" DO-35 9520,5250 r270 top (schematic designator D13)
D13_S4 "1N4148" DO-35 9520,4450 r270 top (schematic designator D13)
D13_S5 "1N4148" DO-35 9520,3650 r270 top (schematic designator D13)
D13_S6 "1N4148" DO-35 9520,2850 r270 top (schematic designator D13)
D13_S7 "1N4148" DO-35 9520,2050 r270 top (schematic designator D13)
D13_S8 "1N4148" DO-35 9520,1250 r270 top (schematic designator D13)
D14_S1 "1N4148" DO-35 9440,6850 r270 top (schematic designator D14)
D14_S2 "1N4148" DO-35 9440,6050 r270 top (schematic designator D14)
D14_S3 "1N4148" DO-35 9440,5250 r270 top (schematic designator D14)
D14_S4 "1N4148" DO-35 9440,4450 r270 top (schematic designator D14)
D14_S5 "1N4148" DO-35 9440,3650 r270 top (schematic designator D14)
D14_S6 "1N4148" DO-35 9440,2850 r270 top (schematic designator D14)
D14_S7 "1N4148" DO-35 9440,2050 r270 top (schematic designator D14)
D14_S8 "1N4148" DO-35 9440,1250 r270 top (schematic designator D14)
D15_S1 "1N4148" DO-35 9360,6850 r270 top (schematic designator D15)
D15_S2 "1N4148" DO-35 9360,6050 r270 top (schematic designator D15)
D15_S3 "1N4148" DO-35 9360,5250 r270 top (schematic designator D15)
D15_S4 "1N4148" DO-35 9360,4450 r270 top (schematic designator D15)
D15_S5 "1N4148" DO-35 9360,3650 r270 top (schematic designator D15)
D15_S6 "1N4148" DO-35 9360,2850 r270 top (schematic designator D15)
D15_S7 "1N4148" DO-35 9360,2050 r270 top (schematic designator D15)
D15_S8 "1N4148" DO-35 9360,1250 r270 top (schematic designator D15)
D16_S1 "1N4148" DO-35 9280,6850 r270 top (schematic designator D16)
D16_S2 "1N4148" DO-35 9280,6050 r270 top (schematic designator D16)
D16_S3 "1N4148" DO-35 9280,5250 r270 top (schematic designator D16)
D16_S4 "1N4148" DO-35 9280,4450 r270 top (schematic designator D16)
D16_S5 "1N4148" DO-35 9280,3650 r270 top (schematic designator D16)
D16_S6 "1N4148" DO-35 9280,2850 r270 top (schematic designator D16)
D16_S7 "1N4148" DO-35 9280,2050 r270 top (schematic designator D16)
D16_S8 "1N4148" DO-35 9280,1250 r270 top (schematic designator D16)
D17_S1 "1N4148" DO-35 9200,6850 r270 top (schematic designator D17)
D17_S2 "1N4148" DO-35 9200,6050 r270 top (schematic designator D17)
D17_S3 "1N4148" DO-35 9200,5250 r270 top (schematic designator D17)
D17_S4 "1N4148" DO-35 9200,4450 r270 top (schematic designator D17)
D17_S5 "1N4148" DO-35 9200,3650 r270 top (schematic designator D17)
D17_S6 "1N4148" DO-35 9200,2850 r270 top (schematic designator D17)
D17_S7 "1N4148" DO-35 9200,2050 r270 top (schematic designator D17)
D17_S8 "1N4148" DO-35 9200,1250 r270 top (schematic designator D17)
D18_S1 "1N4148" DO-35 9120,6850 r270 top (schematic designator D18)
D18_S2 "1N4148" DO-35 9120,6050 r270 top (schematic designator D18)
D18_S3 "1N4148" DO-35 9120,5250 r270 top (schematic designator D18)
D18_S4 "1N4148" DO-35 9120,4450 r270 top (schematic designator D18)
D18_S5 "1N4148" DO-35 9120,3650 r270 top (schematic designator D18)
D18_S6 "1N4148" DO-35 9120,2850 r270 top (schematic designator D18)
D18_S7 "1N4148" DO-35 9120,2050 r270 top (schematic designator D18)
D18_S8 "1N4148" DO-35 9120,1250 r270 top (schematic designator D18)
D19_S1 "1N4148" DO-35 9040,6850 r270 top (schematic designator D19)
D19_S2 "1N4148" DO-35 9040,6050 r270 top (schematic designator D19)
D19_S3 "1N4148" DO-35 9040,5250 r270 top (schematic designator D19)
D19_S4 "1N4148" DO-35 9040,4450 r270 top (schematic designator D19)
D19_S5 "1N4148" DO-35 9040,3650 r270 top (schematic designator D19)
D19_S6 "1N4148" DO-35 9040,2850 r270 top (schematic designator D19)
D19_S7 "1N4148" DO-35 9040,2050 r270 top (schematic designator D19)
D19_S8 "1N4148" DO-35 9040,1250 r270 top (schematic designator D19)
D20_S1 "1N4148" DO-35 8960,6850 r270 top (schematic designator D20)
D20_S2 "1N4148" DO-35 8960,6050 r270 top (schematic designator D20)
D20_S3 "1N4148" DO-35 8960,5250 r270 top (schematic designator D20)
D20_S4 "1N4148" DO-35 8960,4450 r270 top (schematic designator D20)
D20_S5 "1N4148" DO-35 8960,3650 r270 top (schematic designator D20)
D20_S6 "1N4148" DO-35 8960,2850 r270 top (schematic designator D20)
D20_S7 "1N4148" DO-35 8960,2050 r270 top (schematic designator D20)
D20_S8 "1N4148" DO-35 8960,1250 r270 top (schematic designator D20)
D21_S1 "1N4148" DO-35 8880,6850 r270 top (schematic designator D21)
D21_S2 "1N4148" DO-35 8880,6050 r270 top (schematic designator D21)
D21_S3 "1N4148" DO-35 8880,5250 r270 top (schematic designator D21)
D21_S4 "1N4148" DO-35 8880,4450 r270 top (schematic designator D21)
D21_S5 "1N4148" DO-35 8880,3650 r270 top (schematic designator D21)
D21_S6 "1N4148" DO-35 8880,2850 r270 top (schematic designator D21)
D21_S7 "1N4148" DO-35 8880,2050 r270 top (schematic designator D21)
D21_S8 "1N4148" DO-35 8880,1250 r270 top (schematic designator D21)
D22_S1 "1N4148" DO-35 8800,6850 r270 top (schematic designator D22)
D22_S2 "1N4148" DO-35 8800,6050 r270 top (schematic designator D22)
D22_S3 "1N4148" DO-35 8800,5250 r270 top (schematic designator D22)
D22_S4 "1N4148" DO-35 8800,4450 r270 top (schematic designator D22)
D22_S5 "1N4148" DO-35 8800,3650 r270 top (schematic designator D22)
D22_S6 "1N4148" DO-35 8800,2850 r270 top (schematic designator D22)
D22_S7 "1N4148" DO-35 8800,2050 r270 top (schematic designator D22)
D22_S8 "1N4148" DO-35 8800,1250 r270 top (schematic designator D22)
D23_S1 "1N4148" DO-35 8720,6850 r270 top (schematic designator D23)
D23_S2 "1N4148" DO-35 8720,6050 r270 top (schematic designator D23)
D23_S3 "1N4148" DO-35 8720,5250 r270 top (schematic designator D23)
D23_S4 "1N4148" DO-35 8720,4450 r270 top (schematic designator D23)
D23_S5 "1N4148" DO-35 8720,3650 r270 top (schematic designator D23)
D23_S6 "1N4148" DO-35 8720,2850 r270 top (schematic designator D23)
D23_S7 "1N4148" DO-35 8720,2050 r270 top (schematic designator D23)
D23_S8 "1N4148" DO-35 8720,1250 r270 top (schematic designator D23)
D24_S1 "1N4148" DO-35 8640,6850 r270 top (schematic designator D24)
D24_S2 "1N4148" DO-35 8640,6050 r270 top (schematic designator D24)
D24_S3 "1N4148" DO-35 8640,5250 r270 top (schematic designator D24)
D24_S4 "1N4148" DO-35 8640,4450 r270 top (schematic designator D24)
D24_S5 "1N4148" DO-35 8640,3650 r270 top (schematic designator D24)
D24_S6 "1N4148" DO-35 8640,2850 r270 top (schematic designator D24)
D24_S7 "1N4148" DO-35 8640,2050 r270 top (schematic designator D24)
D24_S8 "1N4148" DO-35 8640,1250 r270 top (schematic designator D24)
D25_S1 "1N4148" DO-35 8560,6850 r270 top (schematic designator D25)
D25_S2 "1N4148" DO-35 8560,6050 r270 top (schematic designator D25)
D25_S3 "1N4148" DO-35 8560,5250 r270 top (schematic designator D25)
D25_S4 "1N4148" DO-35 8560,4450 r270 top (schematic designator D25)
D25_S5 "1N4148" DO-35 8560,3650 r270 top (schematic designator D25)
D25_S6 "1N4148" DO-35 8560,2850 r270 top (schematic designator D25)
D25_S7 "1N4148" DO-35 8560,2050 r270 top (schematic designator D25)
D25_S8 "1N4148" DO-35 8560,1250 r270 top (schematic designator D25)
D26_S1 "1N4148" DO-35 8480,6850 r270 top (schematic designator D26)
D26_S2 "1N4148" DO-35 8480,6050 r270 top (schematic designator D26)
D26_S3 "1N4148" DO-35 8480,5250 r270 top (schematic designator D26)
D26_S4 "1N4148" DO-35 8480,4450 r270 top (schematic designator D26)
D26_S5 "1N4148" DO-35 8480,3650 r270 top (schematic designator D26)
D26_S6 "1N4148" DO-35 8480,2850 r270 top (schematic designator D26)
D26_S7 "1N4148" DO-35 8480,2050 r270 top (schematic designator D26)
D26_S8 "1N4148" DO-35 8480,1250 r270 top (schematic designator D26)
D27_S1 "1N4148" DO-35 8400,6850 r270 top (schematic designator D27)
D27_S2 "1N4148" DO-35 8400,6050 r270 top (schematic designator D27)
D27_S3 "1N4148" DO-35 8400,5250 r270 top (schematic designator D27)
D27_S4 "1N4148" DO-35 8400,4450 r270 top (schematic designator D27)
D27_S5 "1N4148" DO-35 8400,3650 r270 top (schematic designator D27)
D27_S6 "1N4148" DO-35 8400,2850 r270 top (schematic designator D27)
D27_S7 "1N4148" DO-35 8400,2050 r270 top (schematic designator D27)
D27_S8 "1N4148" DO-35 8400,1250 r270 top (schematic designator D27)
D28_S1 "1N4148" DO-35 8320,6850 r270 top (schematic designator D28)
D28_S2 "1N4148" DO-35 8320,6050 r270 top (schematic designator D28)
D28_S3 "1N4148" DO-35 8320,5250 r270 top (schematic designator D28)
D28_S4 "1N4148" DO-35 8320,4450 r270 top (schematic designator D28)
D28_S5 "1N4148" DO-35 8320,3650 r270 top (schematic designator D28)
D28_S6 "1N4148" DO-35 8320,2850 r270 top (schematic designator D28)
D28_S7 "1N4148" DO-35 8320,2050 r270 top (schematic designator D28)
D28_S8 "1N4148" DO-35 8320,1250 r270 top (schematic designator D28)
D29_S1 "1N4148" DO-35 8240,6850 r270 top (schematic designator D29)
D29_S2 "1N4148" DO-35 8240,6050 r270 top (schematic designator D29)
D29_S3 "1N4148" DO-35 8240,5250 r270 top (schematic designator D29)
D29_S4 "1N4148" DO-35 8240,4450 r270 top (schematic designator D29)
D29_S5 "1N4148" DO-35 8240,3650 r270 top (schematic designator D29)
D29_S6 "1N4148" DO-35 8240,2850 r270 top (schematic designator D29)
D29_S7 "1N4148" DO-35 8240,2050 r270 top (schematic designator D29)
D29_S8 "1N4148" DO-35 8240,1250 r270 top (schematic designator D29)
D30_S1 "1N4148" DO-35 8160,6850 r270 top (schematic designator D30)
D30_S2 "1N4148" DO-35 8160,6050 r270 top (schematic designator D30)
D30_S3 "1N4148" DO-35 8160,5250 r270 top (schematic designator D30)
D30_S4 "1N4148" DO-35 8160,4450 r270 top (schematic designator D30)
D30_S5 "1N4148" DO-35 8160,3650 r270 top (schematic designator D30)
D30_S6 "1N4148" DO-35 8160,2850 r270 top (schematic designator D30)
D30_S7 "1N4148" DO-35 8160,2050 r270 top (schematic designator D30)
D30_S8 "1N4148" DO-35 8160,1250 r270 top (schematic designator D30)
D31_S1 "1N4148" DO-35 8080,6850 r270 top (schematic designator D31)
D31_S2 "1N4148" DO-35 8080,6050 r270 top (schematic designator D31)
D31_S3 "1N4148" DO-35 8080,5250 r270 top (schematic designator D31)
D31_S4 "1N4148" DO-35 8080,4450 r270 top (schematic designator D31)
D31_S5 "1N4148" DO-35 8080,3650 r270 top (schematic designator D31)
D31_S6 "1N4148" DO-35 8080,2850 r270 top (schematic designator D31)
D31_S7 "1N4148" DO-35 8080,2050 r270 top (schematic designator D31)
D31_S8 "1N4148" DO-35 8080,1250 r270 top (schematic designator D31)
D32_S1 "1N4148" DO-35 8000,6850 r270 top (schematic designator D32)
D32_S2 "1N4148" DO-35 8000,6050 r270 top (schematic designator D32)
D32_S3 "1N4148" DO-35 8000,5250 r270 top (schematic designator D32)
D32_S4 "1N4148" DO-35 8000,4450 r270 top (schematic designator D32)
D32_S5 "1N4148" DO-35 8000,3650 r270 top (schematic designator D32)
D32_S6 "1N4148" DO-35 8000,2850 r270 top (schematic designator D32)
D32_S7 "1N4148" DO-35 8000,2050 r270 top (schematic designator D32)
D32_S8 "1N4148" DO-35 8000,1250 r270 top (schematic designator D32)
D101 "1N4007" DO-41 7100,5700 r0 top
D102 "1N4007" DO-41 6400,5700 r0 top
D103 "1N4007" DO-41 5700,5700 r0 top
D104 "1N4007" DO-41 5000,5700 r0 top
D105 "1N4007" DO-41 3900,5700 r0 top
D106 "1N4007" DO-41 3200,5700 r0 top
D107 "1N4007" DO-41 2500,5700 r0 top
D108 "1N4007" DO-41 1800,5700 r0 top
D109 "1N4007" DO-41 7100,5100 r0 top
D110 "1N4007" DO-41 6400,5100 r0 top
D111 "1N4007" DO-41 5700,5100 r0 top
D112 "1N4007" DO-41 5000,5100 r0 top
D113 "1N4007" DO-41 3900,5100 r0 top
D114 "1N4007" DO-41 3200,5100 r0 top
D115 "1N4007" DO-41 2500,5100 r0 top
D116 "1N4007" DO-41 1800,5100 r0 top
D117 "1N4007" DO-41 7100,4500 r0 top
D118 "1N4007" DO-41 6400,4500 r0 top
D119 "1N4007" DO-41 5700,4500 r0 top
D120 "1N4007" DO-41 5000,4500 r0 top
D121 "1N4007" DO-41 3900,4500 r0 top
D122 "1N4007" DO-41 3200,4500 r0 top
D123 "1N4007" DO-41 2500,4500 r0 top
D124 "1N4007" DO-41 1800,4500 r0 top
D125 "1N4007" DO-41 7100,3900 r0 top
D126 "1N4007" DO-41 6400,3900 r0 top
D127 "1N4007" DO-41 5700,3900 r0 top
D128 "1N4007" DO-41 5000,3900 r0 top
D129 "1N4007" DO-41 3900,3900 r0 top
D130 "1N4007" DO-41 3200,3900 r0 top
D131 "1N4007" DO-41 2500,3900 r0 top
D132 "1N4007" DO-41 1800,3900 r0 top
D133 "1N4007" DO-41 7100,3300 r0 top
D134 "1N4007" DO-41 6400,3300 r0 top
D135 "1N4007" DO-41 5700,3300 r0 top
D136 "1N4007" DO-41 5000,3300 r0 top
D137 "1N4007" DO-41 3900,3300 r0 top
D138 "1N4007" DO-41 3200,3300 r0 top
D139 "1N4007" DO-41 2500,3300 r0 top
D140 "1N4007" DO-41 1800,3300 r0 top
D141 "1N4007" DO-41 7100,2700 r0 top
D142 "1N4007" DO-41 6400,2700 r0 top
D143 "1N4007" DO-41 5700,2700 r0 top
D144 "1N4007" DO-41 5000,2700 r0 top
D145 "1N4007" DO-41 3900,2700 r0 top
D146 "1N4007" DO-41 3200,2700 r0 top
D147 "1N4007" DO-41 2500,2700 r0 top
D148 "1N4007" DO-41 1800,2700 r0 top
D149 "1N4007" DO-41 7100,2100 r0 top
D150 "1N4007" DO-41 6400,2100 r0 top
D151 "1N4007" DO-41 5700,2100 r0 top
D152 "1N4007" DO-41 5000,2100 r0 top
D153 "1N4007" DO-41 3900,2100 r0 top
D154 "1N4007" DO-41 3200,2100 r0 top
D155 "1N4007" DO-41 2500,2100 r0 top
D156 "1N4007" DO-41 1800,2100 r0 top
D157 "1N4007" DO-41 7100,1500 r0 top
D158 "1N4007" DO-41 6400,1500 r0 top
D159 "1N4007" DO-41 5700,1500 r0 top
D160 "1N4007" DO-41 5000,1500 r0 top
D161 "1N4007" DO-41 3900,1500 r0 top
D162 "1N4007" DO-41 3200,1500 r0 top
D163 "1N4007" DO-41 2500,1500 r0 top
D164 "1N4007" DO-41 1800,1500 r0 top
L1 "Inductor Iron" AXIAL-0.9 28500,2500 r90 top value=10mH
L2 "Inductor Iron" AXIAL-0.9 28300,2500 r90 top value=10mH
L3 "Inductor Iron" AXIAL-0.9 28000,2500 r90 top value=10mH
L4 "Inductor Iron" AXIAL-0.9 27700,2500 r90 top value=10mH
L5 "Inductor Iron" AXIAL-0.9 27500,2500 r90 top value=10mH
L6 "Inductor Iron" AXIAL-0.9 27200,2500 r90 top value=10mH
L7 "Inductor Iron" AXIAL-0.9 27000,2500 r90 top value=10mH
L8 "Inductor Iron" AXIAL-0.9 26700,2500 r90 top value=10mH
L9 "Inductor Iron" AXIAL-0.9 26500,2500 r90 top value=10mH
L10 "Inductor Iron" AXIAL-0.9 26200,2500 r90 top value=10mH
L11 "Inductor Iron" AXIAL-0.9 25900,2500 r90 top value=10mH
L12 "Inductor Iron" AXIAL-0.9 25700,2500 r90 top value=10mH
L13 "Inductor Iron" AXIAL-0.9 25400,2500 r90 top value=10mH
L14 "Inductor Iron" AXIAL-0.9 25200,2500 r90 top value=10mH
L15 "Inductor Iron" AXIAL-0.9 24900,2500 r90 top value=10mH
L16 "Inductor Iron" AXIAL-0.9 24700,2500 r90 top value=10mH
L17 "Inductor Iron" AXIAL-0.9 23900,2500 r90 top value=10mH
L18 "Inductor Iron" AXIAL-0.9 23600,2500 r90 top value=10mH
L19 "Inductor Iron" AXIAL-0.9 23400,2500 r90 top value=10mH
L20 "Inductor Iron" AXIAL-0.9 23100,2500 r90 top value=10mH
L21 "Inductor Iron" AXIAL-0.9 22900,2500 r90 top value=10mH
L22 "Inductor Iron" AXIAL-0.9 22600,2500 r90 top value=10mH
L23 "Inductor Iron" AXIAL-0.9 22300,2500 r90 top value=10mH
L24 "Inductor Iron" AXIAL-0.9 22100,2500 r90 top value=10mH
L25 "Inductor Iron" AXIAL-0.9 21600,2500 r90 top value=10mH
L26 "Inductor Iron" AXIAL-0.9 21300,2500 r90 top value=10mH
L27 "Inductor Iron" AXIAL-0.9 21000,2500 r90 top value=10mH
L28 "Inductor Iron" AXIAL-0.9 20800,2500 r90 top value=10mH
L29 "Inductor Iron" AXIAL-0.9 20500,2500 r90 top value=10mH
L30 "Inductor Iron" AXIAL-0.9 20300,2500 r90 top value=10mH
L31 "Inductor Iron" AXIAL-0.9 20000,2500 r90 top value=10mH
L32 "Inductor Iron" AXIAL-0.9 19800,2500 r90 top value=10mH
L33 "Inductor Iron" AXIAL-0.9 19500,2500 r90 top value=10mH
L34 "Inductor Iron" AXIAL-0.9 19200,2500 r90 top value=10mH
L35 "Inductor Iron" AXIAL-0.9 19000,2500 r90 top value=10mH
L36 "Inductor Iron" AXIAL-0.9 18700,2500 r90 top value=10mH
L37 "Inductor Iron" AXIAL-0.9 18500,2500 r90 top value=10mH
L38 "Inductor Iron" AXIAL-0.9 18200,2500 r90 top value=10mH
L39 "Inductor Iron" AXIAL-0.9 18000,2500 r90 top value=10mH
L40 "Inductor Iron" AXIAL-0.9 17700,2500 r90 top value=10mH
L41 "Inductor Iron" AXIAL-0.9 17400,2500 r90 top value=10mH
L42 "Inductor Iron" AXIAL-0.9 17200,2500 r90 top value=10mH
L43 "Inductor Iron" AXIAL-0.9 16900,2500 r90 top value=10mH
L44 "Inductor Iron" AXIAL-0.9 16700,2500 r90 top value=10mH
L45 "Inductor Iron" AXIAL-0.9 16400,2500 r90 top value=10mH
L46 "Inductor Iron" AXIAL-0.9 16100,2500 r90 top value=10mH
L47 "Inductor Iron" AXIAL-0.9 15900,2500 r90 top value=10mH
L48 "Inductor Iron" AXIAL-0.9 15600,2500 r90 top value=10mH
L49 "Inductor Iron" AXIAL-0.9 15400,2500 r90 top value=10mH
L50 "Inductor Iron" AXIAL-0.9 15100,2500 r90 top value=10mH
L51 "Inductor Iron" AXIAL-0.9 14900,2500 r90 top value=10mH
L52 "Inductor Iron" AXIAL-0.9 14600,2500 r90 top value=10mH
L53 "Inductor Iron" AXIAL-0.9 14300,2500 r90 top value=10mH
L54 "Inductor Iron" AXIAL-0.9 14100,2500 r90 top value=10mH
L55 "Inductor Iron" AXIAL-0.9 13800,2500 r90 top value=10mH
L56 "Inductor Iron" AXIAL-0.9 13600,2500 r90 top value=10mH
L57 "Inductor Iron" AXIAL-0.9 13300,2500 r90 top value=10mH
L58 "Inductor Iron" AXIAL-0.9 13100,2500 r90 top value=10mH
L59 "Inductor Iron" AXIAL-0.9 12800,2500 r90 top value=10mH
L60 "Inductor Iron" AXIAL-0.9 12500,2500 r90 top value=10mH
L61 "Inductor Iron" AXIAL-0.9 12300,2500 r90 top value=10mH
L62 "Inductor Iron" AXIAL-0.9 12000,2500 r90 top value=10mH
L63 "Inductor Iron" AXIAL-0.9 11800,2500 r90 top value=10mH
L64 "Inductor Iron" AXIAL-0.9 11500,2500 r90 top value=10mH
P1 "EN_X" HDR1X18 10050,7500 r180 top
P2 "EN_Y#" HDR1X10 10900,7100 r270 top
P3 "Sense" HDR2X10 10900,5950 r270 top
P4 "Excite" HDR2X10 7600,1500 r90 top
R1_S1 "" AXIAL-0.3 10400,7225 r90 top value=100k (schematic designator R1)
R1_S2 "" AXIAL-0.3 10400,6425 r90 top value=100k (schematic designator R1)
R1_S3 "" AXIAL-0.3 10400,5625 r90 top value=100k (schematic designator R1)